# EAGLE board Main-Board (EAGLE 6.4)
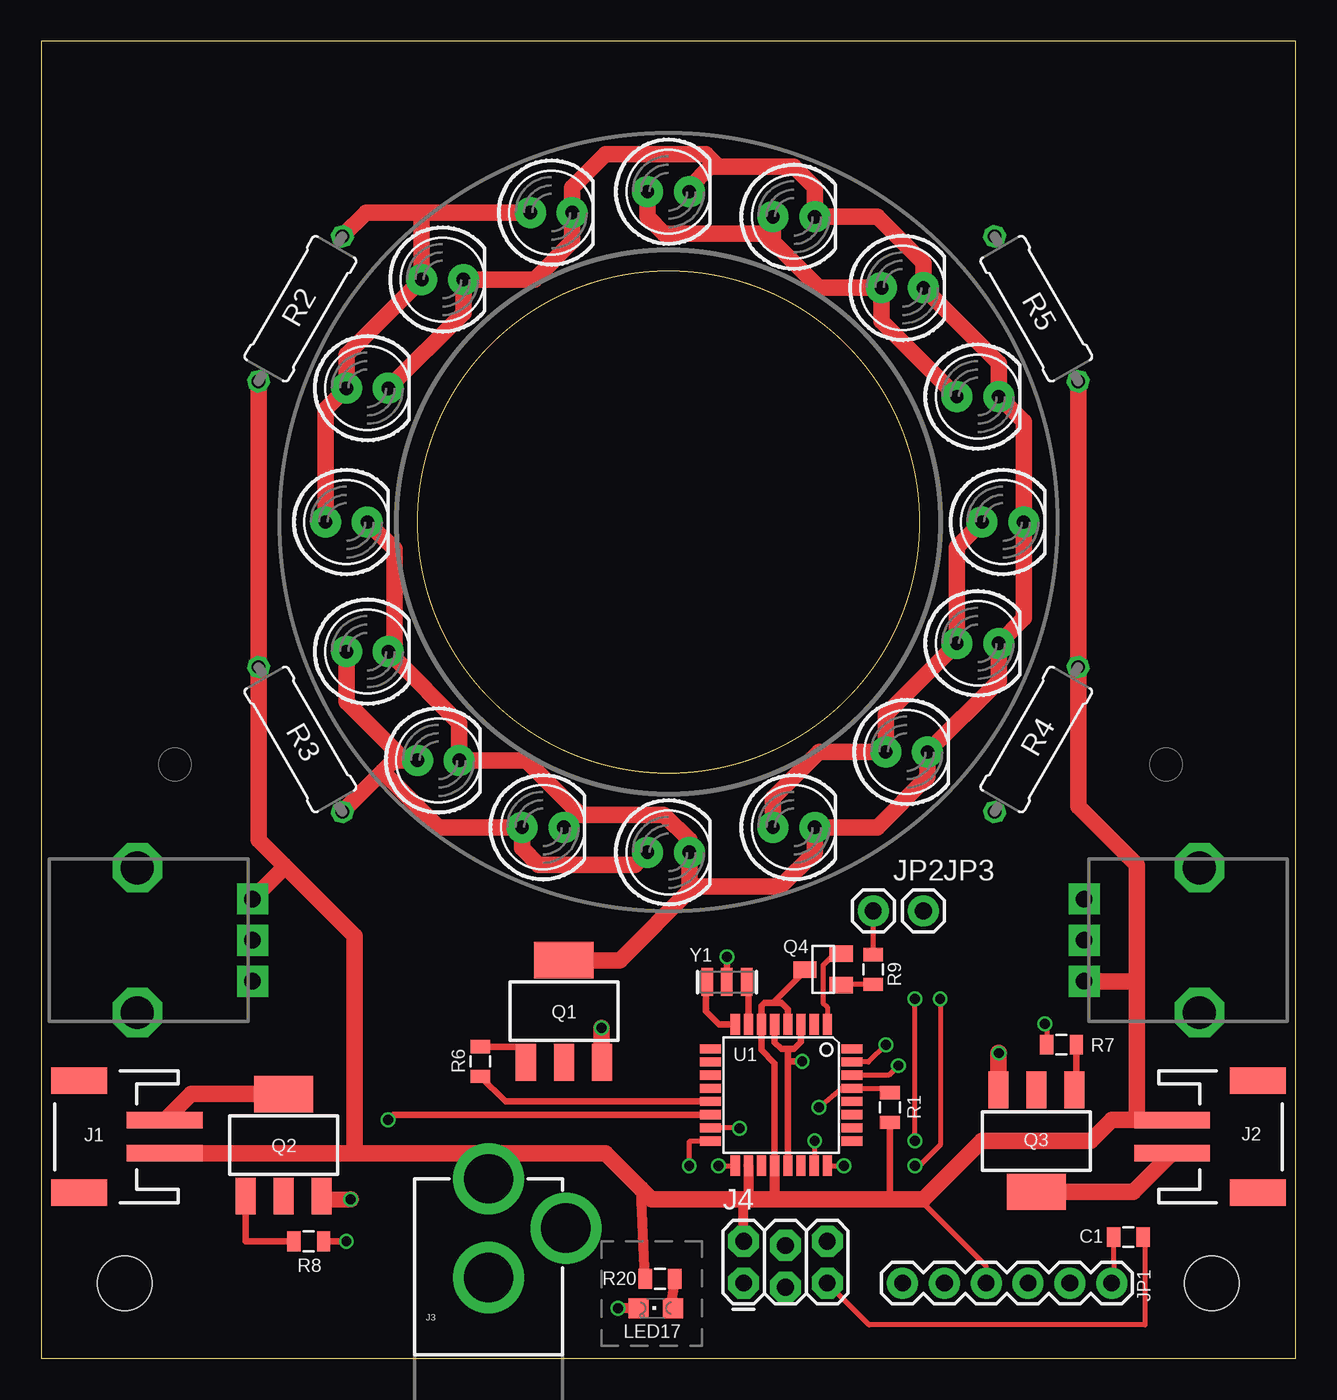
[diagram p0: board, top side]
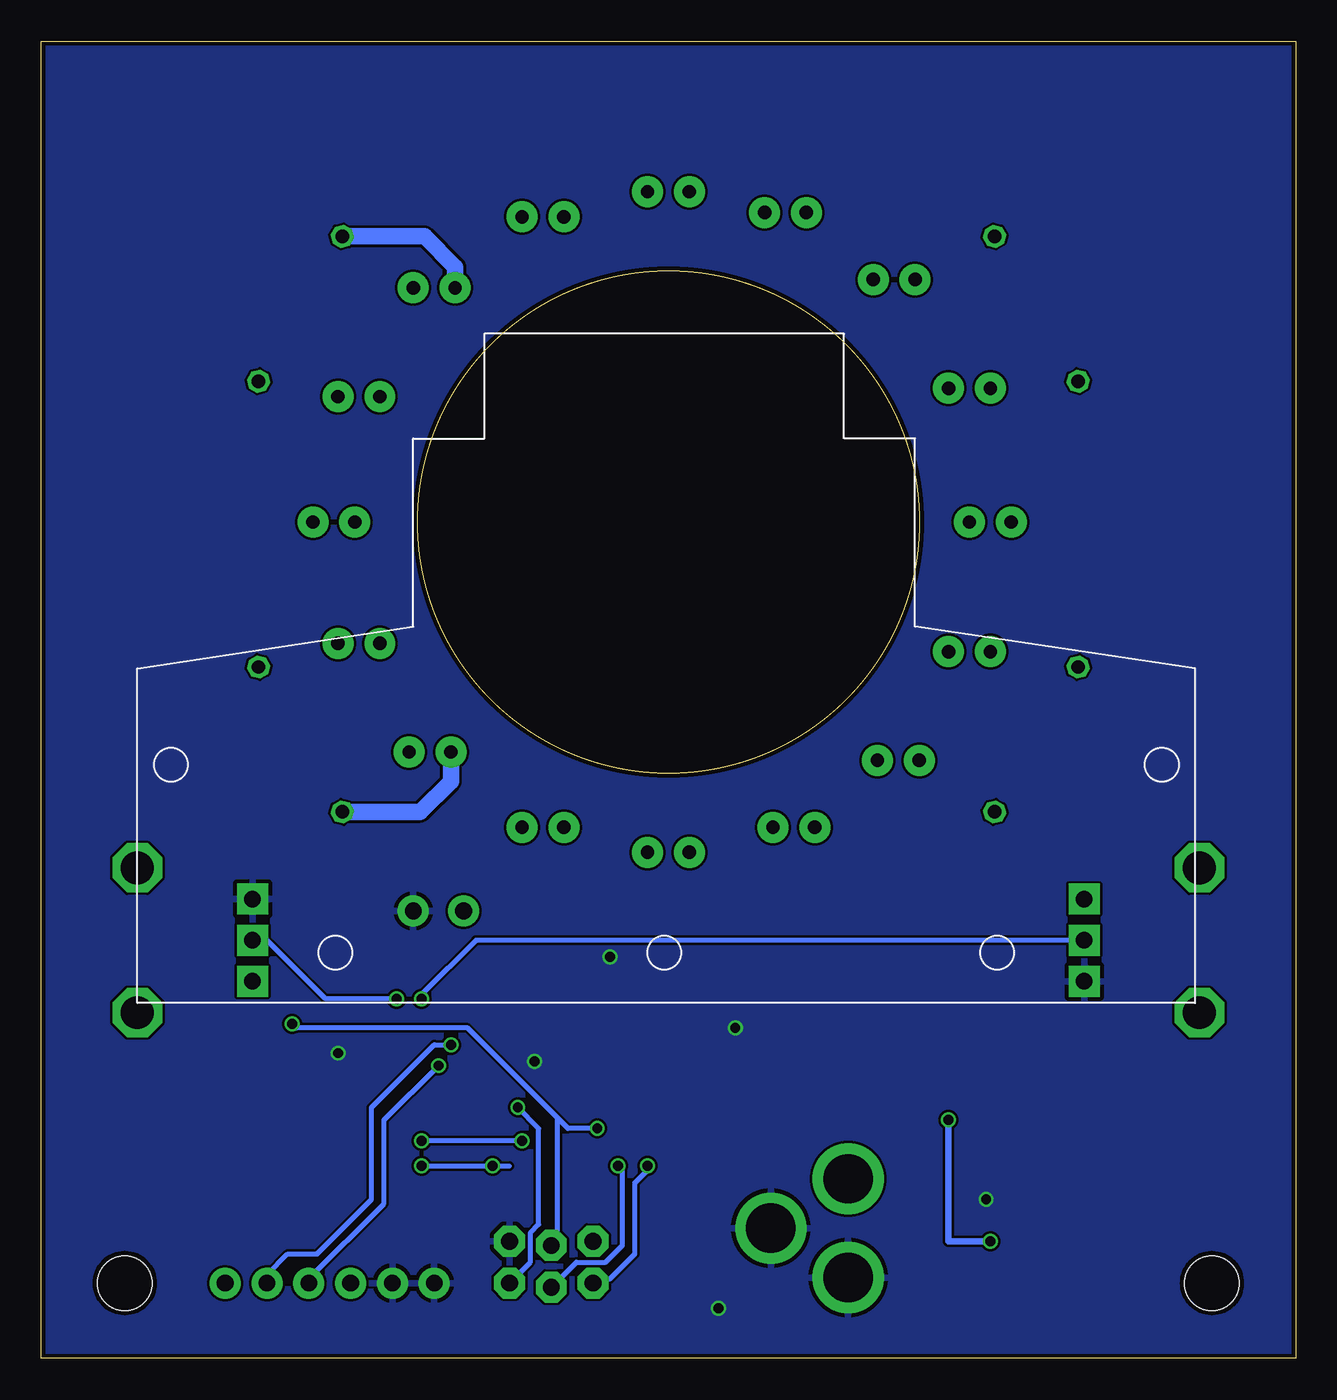
[diagram p1: board, bottom side, seen from below]

Size 76.2 x 80.01 mm. Coordinates in mm from the lower left corner, seen from the top.
Outline: 0,0 76.2,0 76.2,80.01 0,80.01 0,0
Outline: circle at 38.1,50.8 radius 15.24
Copper layers (1*16): Top 0.035mm / dielectric 1.5mm / Bottom 0.035mm
Design rules "Fusion_eagle_rule_v1.1": minimum track width 6mil, minimum drill 12mil, track to track 6mil, track to pad 6mil, pad to pad 6mil, via to via 6mil, smd to smd 0mil, copper to edge 10mil, drill to drill 10mil, minimum pad ring 10mil, minimum via ring 6mil, stop-mask expansion 2mil, vias tented up to drill 100mil, thermal gap 10mil

## Footprints (pad centres in the part's own frame; a part is rotated, then mirrored left to right if it is on the bottom)
0805 = smd 0.8 x 1.2: 1 -0.9,0; 2 0.9,0
JST-2-SMD = smd 1 x 4.6: 1 -1,-3.7; 2 1,-3.7 | smd 1.6 x 3.4: NC1 -3.4,1.5; NC2 3.4,1.5
POWER_JACK_PTH = drill 2.997 pad 4.318: GND 0,7.7; GNDBREAK 4.7,10.7; PWR 0,13.7
2X3_LOCK = drill 1.016 pad 1.88 octagon: 1 0,0; 2 0,2.54; 3 2.54,-0.254; 4 2.54,2.286; 5 5.08,0; 6 5.08,2.54
FTDI_BASIC = drill 1.016 pad 1.88: CTS 10.16,0; DTR 0,0; GND 12.7,0; RXI 2.54,0; TXO 5.08,0; VCC 7.62,0
1X01 = drill 1.016 pad 1.88: 1 0,0
LED5MM = drill 0.813 pad 1.88: A -1.27,0; K 1.27,0
CHIPLED_0805 = smd 1.2 x 1.2: A 0,-1.05; C 0,1.05
SOT223 = smd 1.219 x 2.235: 1 -2.311,-3.099; 2 0,-3.099; 3 2.311,-3.099 | smd 3.6 x 2.2: 4 0,3.099
SOT23 = smd 1 x 1.4: 1 -0.95,-1.1; 2 0.95,-1.1; 3 0,1.1
0309/10 = drill 0.813 octagon: 1 -5.08,0; 2 5.08,0
ALPS_POT = drill 1 pad 1.88 square: P$1 7,-2.5; P$2 7,0; P$3 7,2.5 | drill 2 octagon: P$4 0,-4.4; P$5 0,4.4
STAND-OFF = hole 3.302: 0,0
TQFP32-08 = smd 1.27 x 0.559: 1 -4.293,2.8; 2 -4.293,2; 3 -4.293,1.2; 4 -4.293,0.4; 5 -4.293,-0.4; 6 -4.293,-1.2; 7 -4.293,-2; 8 -4.293,-2.8; 17 4.293,-2.8; 18 4.293,-2; 19 4.293,-1.2; 20 4.293,-0.4; 21 4.293,0.4; 22 4.293,1.2; 23 4.293,2; 24 4.293,2.8 | smd 0.559 x 1.27: 9 -2.8,-4.293; 10 -2,-4.293; 11 -1.2,-4.293; 12 -0.4,-4.293; 13 0.4,-4.293; 14 1.2,-4.293; 15 2,-4.293; 16 2.8,-4.293; 25 2.8,4.293; 26 2,4.293; 27 1.2,4.293; 28 0.4,4.293; 29 -0.4,4.293; 30 -1.2,4.293; 31 -2,4.293; 32 -2.8,4.293
RESONATOR-SMD = smd 0.7 x 1.7: 1 -1.2,0; 2 0,0; 3 1.2,0

## Placement (x,y rotation side)
C1  0.1uF  [0805]  66.04,7.37 180 top
J1  [JST-2-SMD]  3.81,13.46 90 top
J2  [JST-2-SMD]  72.39,13.46 270 top
J3  POWER_JACKPTH  [POWER_JACK_PTH]  27.18,-2.79 0 top
J4  AVR_SPI_PRG_62X3_LOCK  [2X3_LOCK]  42.67,4.57 0 top
JP1  FTDI_BASICPTH  [FTDI_BASIC]  65.02,4.57 180 top
JP2  VSYNC  [1X01]  50.55,27.18 0 top
JP3  GND  [1X01]  53.59,27.18 0 top
LED1  [LED5MM]  30.99,69.6 0 top
LED2  [LED5MM]  24.38,65.53 0 top
LED3  [LED5MM]  19.81,58.93 0 top
LED4  [LED5MM]  18.54,50.8 0 top
LED5  [LED5MM]  19.81,42.93 0 top
LED6  [LED5MM]  24.13,36.32 0 top
LED7  [LED5MM]  30.48,32.26 0 top
LED8  [LED5MM]  38.1,30.73 0 top
LED9  [LED5MM]  45.72,32.26 0 top
LED10  [LED5MM]  52.58,36.83 0 top
LED11  [LED5MM]  56.9,43.43 0 top
LED12  [LED5MM]  58.42,50.8 0 top
LED13  [LED5MM]  56.9,58.42 0 top
LED14  [LED5MM]  52.32,65.02 0 top
LED15  [LED5MM]  45.72,69.34 0 top
LED16  [LED5MM]  38.1,70.87 0 top
LED17  [CHIPLED_0805]  37.34,3.05 90 top
Q1  DMN3404L  [SOT223]  31.75,21.08 0 top
Q2  DMN3404L  [SOT223]  14.73,12.95 0 top
Q3  DMN3404L  [SOT223]  60.45,13.21 180 top
Q4  MMBT2222A  [SOT23]  47.5,23.62 90 top
R1  10k  [0805]  51.56,15.24 270 top
R2  39ohm  [0309/10]  15.75,63.75 240 top
R3  39ohm  [0309/10]  15.75,37.59 120 top
R4  39ohm  [0309/10]  60.45,37.59 60 top
R5  39ohm  [0309/10]  60.45,63.75 300 top
R6  100ohm  [0805]  26.67,18.03 90 top
R7  100ohm  [0805]  61.98,19.05 0 top
R8  100ohm  [0805]  16.26,7.11 180 top
R9  100ohm  [0805]  50.55,23.62 90 top
R11  10k  [ALPS_POT]  70.36,25.4 180 top
R12  10k  [ALPS_POT]  5.84,25.4 0 top
R20  10k  [0805]  37.59,4.83 180 top
STANDOFF1  STAND-OFF  [STAND-OFF]  5.08,4.57 0 top
STANDOFF2  STAND-OFF  [STAND-OFF]  71.12,4.57 0 top
U1  ATMEGA328P  [TQFP32-08]  44.96,16 270 top
U$4  PS3EYE  [PS3EYE]  38.35,41.91 180 bottom
Y1  16mhz  [RESONATOR-SMD]  41.66,22.86 180 top

## Library data of the parts
C1 = SparkFun-Capacitors
J1 J2 = SparkFun-Connectors; PROD_ID: CONN-08352
J3 J4 JP1-JP3 = SparkFun-Connectors
LED1-LED16 = SparkFun-LED
LED17 = led
Q1-Q3 = transistor-power
Q4 = SparkFun-DiscreteSemi
R1 R6-R9 R20 = SparkFun-Resistors
R2-R5 = resistor
R11 R12 STANDOFF1 STANDOFF2 = SparkFun-Electromechanical
U1 = SparkFun-DigitalIC; PROD_ID: IC-09069
U$4 = ps3eye
Y1 = SparkFun-FreqCtrl; PROD_ID: XTAL-08900

## Nets
5V: J1.1 J2.1 J3.PWR J4.2 JP1.VCC Q4.3 R1.2 R2.2 R3.2 R4.2 R5.2 R11.P$3 R12.P$3 R20.2 U1.4 U1.6 U1.18 U1.20
GLINT_RIGHT: R8.1 U1.14
GND: J3.GND J3.GNDBREAK J4.6 JP1.CTS JP1.GND JP3.1 LED17.C Q1.3 Q2.3 Q3.3 R11.P$1 R12.P$1 U1.3 U1.5 U1.21 Y1.2
LED_RING: R6.1 U1.13
LEFT_BRIGHTNESS: R12.P$2 U1.23
MISO: J4.1 U1.16
MOSI: J4.4 R7.1 U1.15
N$1: LED17.A R20.1
N$2: U1.7 Y1.1
N$3: U1.8 Y1.3
N$4: LED1.A LED2.A LED3.A LED4.A R2.1
N$5: J2.2 Q3.4
N$6: LED5.A LED6.A LED7.A LED8.A R3.1
N$7: Q1.1 R6.2
N$8: LED9.A LED10.A LED11.A LED12.A R4.1
N$9: Q3.1 R7.2
N$10: LED13.A LED14.A LED15.A LED16.A R5.1
N$11: J1.2 Q2.4
N$13: LED1.K LED2.K LED3.K LED4.K LED5.K LED6.K LED7.K LED8.K LED9.K LED10.K LED11.K LED12.K LED13.K LED14.K LED15.K LED16.K Q1.4
N$14: Q2.1 R8.2
N$15: Q4.1 R9.1
N$16: C1.2 JP1.DTR
N$17: JP2.1 R9.2
RESET: C1.1 J4.5 R1.1 U1.29
RIGHT_BRIGHTNESS: R11.P$2 U1.24
RXI: JP1.RXI U1.31
SCK: J4.3 U1.17
TXO: JP1.TXO U1.30
VSYNC_IN: Q4.2 U1.1

## Tracks (layer width: path | path; a pad name or v marks a point on that pad's centre or on a via)
5V
  Top 0.305: JP1.VCC 57.4,5.59 53.34,9.65
  Top 0.406: R1.2 51.56,9.91 51.31,9.65 | 44.56,11.18 44.56,17.93 43.76,18.73 U1.6 43.76,21.41 43.94,21.59 44.45,21.59 | 44.45,21.59 44.96,21.59 45.36,21.19 U1.4 | Q4.3 46.4,23.54 44.45,21.59
  Top 0.61: J4.2 42.67,9.4 42.93,9.65 42.96,9.68 U1.18 | U1.20 44.56,11.18 44.56,9.76 44.45,9.65 | R20.2 36.44,10.28 36.45,10.29
  Top 1.016: 66.55,14.48 65.02,14.48 63.75,13.21 57.15,13.21 53.59,9.65 53.34,9.65 51.31,9.65 44.45,9.65 42.93,9.65 37.08,9.65 36.45,10.29 34.27,12.46 27.18,12.46 | 66.55,14.48 68.42,14.48 J2.1 | 66.55,22.61 66.55,29.97 62.99,33.53 R4.2 R5.2 | 66.55,22.61 66.55,14.48 | R11.P$3 66.25,22.9 66.55,22.61 | R3.2 | R3.2 R2.2 | J1.1 19.3,12.46 | 19.3,12.46 19.05,12.72 19.05,25.65 14.73,29.97 | 19.3,12.46 27.18,12.46 | J3.PWR 27.18,12.46 | 14.73,29.97 13.21,31.5 R3.2 | R12.P$3 14.73,29.79 14.73,29.97
GLINT_RIGHT  (via drill 0.6)
  Top 0.406: v21.08,14.48 21.41,14.8 U1.14 | R8.1 v18.54,7.11
  Bottom 0.406: v18.54,7.11 21.08,7.11 v21.08,14.48
GND  (via drill 0.6)
  Top 0.406: Y1.2 v41.66,24.38 | U1.3 46.16,19.23 45.72,18.8 45.21,18.8 | 45.21,18.8 44.96,18.8 44.56,19.2 U1.5 | U1.21 45.36,18.03 | 45.36,18.03 45.36,18.65 arc90 45.21,18.8 | v46.23,18.03 45.36,18.03
  Top 0.61: LED17.C v35.05,3.05
  Top 1.016: Q2.3 17.25,9.63 v18.8,9.65 | Q3.3 58.14,18.52 arc-90 v58.17,18.54 | Q1.3 34.04,17.98 v34.04,20.07
  pour Bottom: -0.51,-0.25 76.45,-0.25 76.45,80.52 -0.25,80.52
LED_RING
  Top 0.406: U1.13 28.2,15.6 R6.1
LEFT_BRIGHTNESS  (via drill 0.6)
  Top 0.305: v53.09,13.21 v53.09,21.84 | v46.99,13.21 46.99,11.94 U1.23
  Bottom 0.305: R12.P$2 49.78,25.4 53.09,22.1 v53.09,21.84 | v46.99,13.21 v53.09,13.21
MISO  (via drill 0.6)
  Top 0.305: v39.37,11.68 39.37,13.18 40.66,13.18 U1.16
  Bottom 0.305: J4.1 42.42,4.83 41.66,4.83 40.13,6.35 40.13,10.67 39.37,11.43 v39.37,11.68
MOSI  (via drill 0.6)
  Top 0.305: v60.96,20.32 61.08,20.2 R7.1 | v42.42,13.97 42.39,14 U1.15
  Bottom 0.305: v42.42,13.97 44.2,13.97 44.83,14.61 | 44.83,14.61 50.29,20.07 60.71,20.07 v60.96,20.32 | J4.4 44.83,7.24 44.83,14.61
N$1
  Top 0.61: R20.1 38.24,3.2 LED17.A
N$2
  Top 0.406: U1.7 42.96,22.76 Y1.1
N$3
  Top 0.406: U1.8 41.17,20.3 40.39,21.08 40.39,22.79 Y1.3
N$4
  Top 1.016: LED1.A 23.11,69.6 | 23.11,69.6 19.73,69.6 R2.1 | 23.11,69.6 LED2.A 18.54,60.96 LED3.A 17.27,57.66 LED4.A
N$5
  Top 1.016: Q3.4 66.34,10.11 J2.2
N$6
  Top 1.016: R3.1 20.74,35.65 | 20.74,35.65 21.42,36.32 22.1,36.32 | 22.1,36.32 LED6.A | LED5.A 18.54,39.88 22.1,36.32 | 20.74,35.65 24.13,32.26 LED7.A 29.21,30.99 30.23,29.97 36.07,29.97 LED8.A
N$7
  Top 0.406: R6.2 29.44,18.93 Q1.1
N$8
  Top 1.016: LED9.A 44.45,34.04 47.24,36.83 LED10.A 51.31,39.12 LED11.A 55.63,49.28 LED12.A
  Bottom 1.016: R4.1 53.17,33.19 51.31,35.05 LED10.A
N$9
  Top 0.406: Q3.1 62.88,16.42 R7.2
N$10
  Top 1.016: LED13.A 51.05,62.99 LED14.A 47.24,65.02 44.45,67.82 | 44.45,67.82 LED15.A | LED16.A 36.83,69.34 37.85,68.33 43.94,68.33 44.45,67.82
  Bottom 1.016: R5.1 52.91,68.15 51.05,66.29 LED14.A
N$11
  Top 1.016: J1.2 9.1,16.05 Q2.4
N$13
  Top 1.016: LED7.K 32.51,33.02 32.77,33.02 | 32.77,33.02 37.85,33.02 39.37,31.5 LED8.K 39.37,28.65 39.62,28.65 | 32.77,33.02 29.46,36.32 LED6.K 25.4,38.61 21.46,42.55 | LED5.K 21.46,42.55 | LED4.K 21.46,49.15 21.46,42.55 | LED16.K 39.37,71.12 40.64,72.39 41.15,72.39 | 41.15,72.39 45.72,72.39 46.99,71.12 LED15.K 50.8,69.34 53.59,66.55 LED14.K 58.17,60.45 LED13.K 59.69,56.9 LED12.K 59.69,44.96 LED11.K 58.17,41.15 LED10.K 53.85,35.31 50.8,32.26 LED9.K 46.99,30.73 44.91,28.65 39.62,28.65 | 41.15,72.39 40.39,73.15 34.29,73.15 32.26,71.12 LED1.K 32.26,67.82 29.97,65.53 LED2.K 25.65,63.5 LED3.K | Q1.4 35.15,24.18 39.62,28.65
N$14
  Top 0.406: R8.2 12.42,7.11 Q2.1
N$15
  Top 0.305: R9.1 48.65,22.72 Q4.1
N$16
  Top 0.305: C1.2 65.16,4.43 JP1.DTR
N$17
  Top 0.305: R9.2 JP2.1
RESET  (via drill 0.6)
  Top 0.305: v47.24,15.24 48.62,16.4 U1.29 51.3,16.4 R1.1 | C1.1 67.06,7.37 67.06,2.03 50.29,2.03 J4.5
  Bottom 0.305: J4.5 46.48,5.84 46.48,7.62 45.97,8.13 45.97,13.97 v47.24,15.24
RIGHT_BRIGHTNESS  (via drill 0.6)
  Top 0.305: v54.61,21.84 54.61,12.95 53.34,11.68 v53.09,11.68 | v48.77,11.68 48.01,11.68 U1.24
  Bottom 0.305: v53.09,11.68 v48.77,11.68 47.75,11.68 | v54.61,21.84 58.93,21.84 62.48,25.4 R11.P$2
RXI  (via drill 0.6)
  Top 0.305: v51.31,19.05 50.26,18 U1.31
  Bottom 0.305: JP1.RXI 62.48,5.08 61.21,6.35 59.44,6.35 56.13,9.65 56.13,15.24 52.32,19.05 v51.31,19.05
SCK  (via drill 0.6)
  Top 0.305: v41.15,11.68 42.13,11.68 U1.17
  Bottom 0.305: J4.3 43.69,5.84 41.91,5.84 40.89,6.86 40.89,11.43 v41.15,11.68
TXO  (via drill 0.6)
  Top 0.305: v52.07,17.78 51.49,17.2 U1.30
  Bottom 0.305: JP1.TXO 59.94,4.83 55.37,9.4 55.37,14.48 v52.07,17.78
VSYNC_IN
  Top 0.305: Q4.2 48.19,24.57 47.5,23.88 47.5,21.59 47.75,21.34 U1.1

## Text on the board
tDocu: LEFT | BRIGHTNESS | POWER